# Altium PCB MUX DIGITAL PIN PCB.PcbDoc
Units mil, origin at the board's own origin, x right, y up, seen from the top; angles counter-clockwise.
Board outline 6000 x 4000 mil, 2 copper layers (Top Layer, Bottom Layer); 13 components, 62 nets, 146 pads, 39 vias.
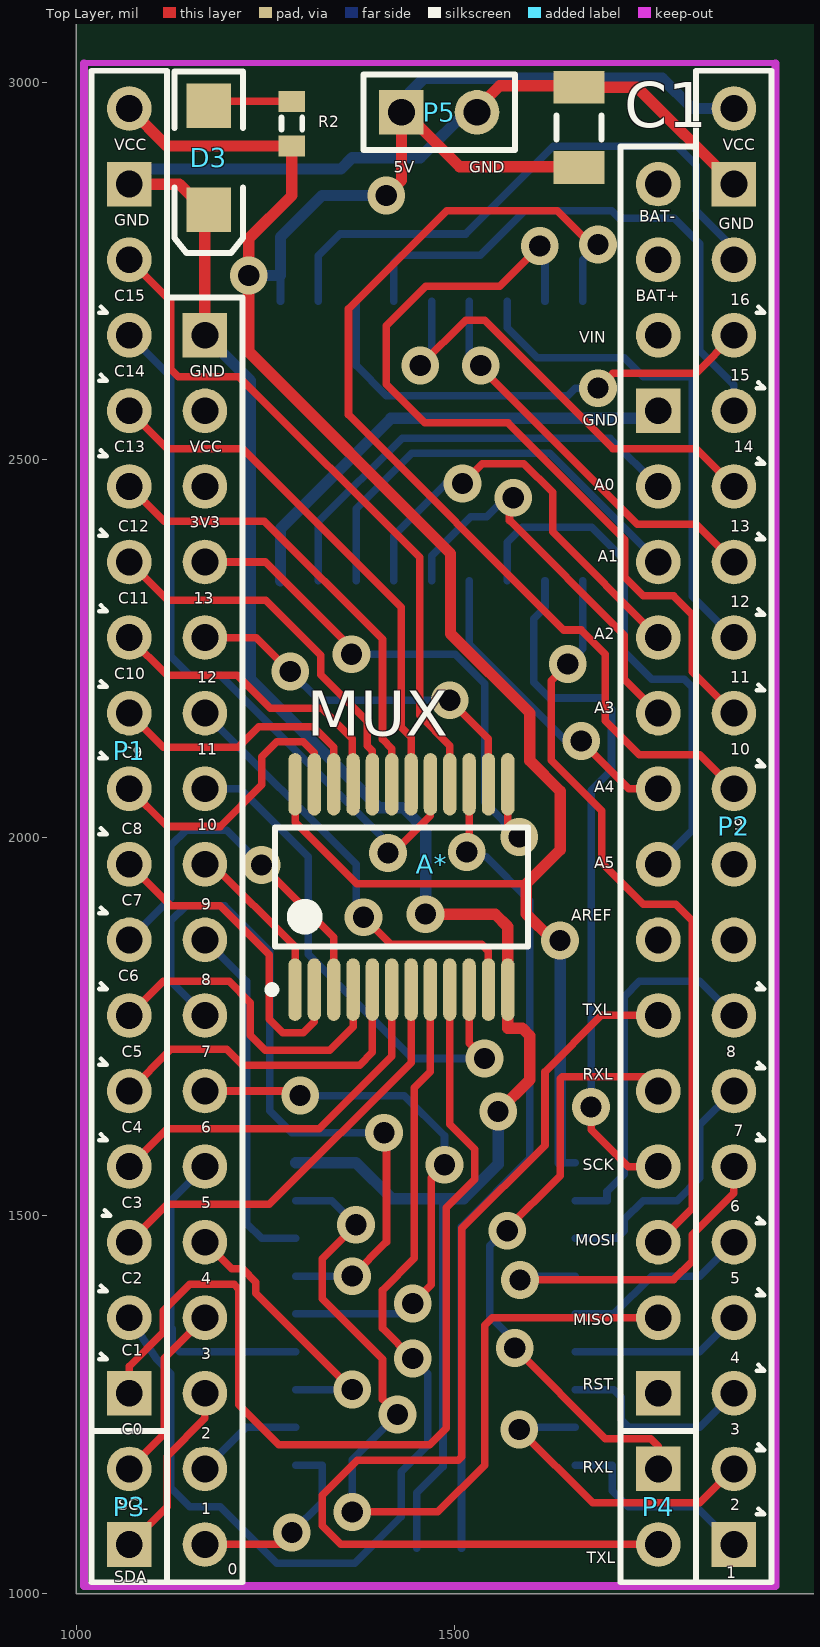
[diagram p0: Top Layer view]
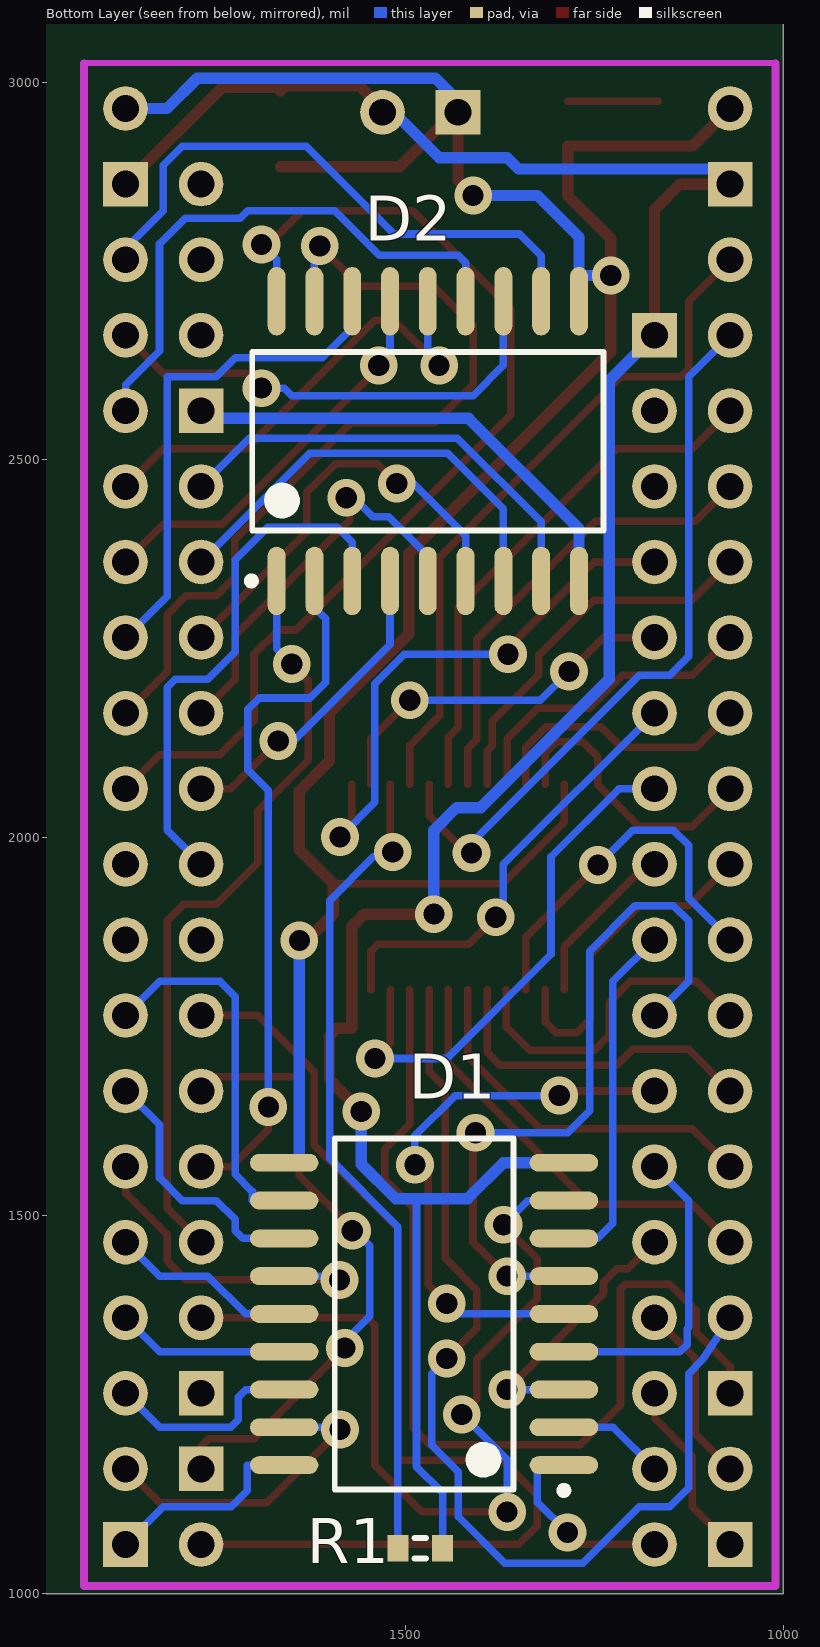
[diagram p1: Bottom Layer view, seen from below]

## Layer stack, top to bottom
Top Layer: signal copper 1.4
Dielectric: dielectric 12.6, FR-4, Dk 4.8
Bottom Layer: signal copper 1.4

## Board outline
1000,1000 7000,1000 7000,5000 1000,5000

## Design rules (kind name [scope] priority, off if disabled: settings)
Clearance Clearance_1 [All] p1: gap=6
Clearance [All] p2: gap=6
PolygonConnect [All] p1: connectstyle=Relief reliefconductorwidth=10 reliefentries=4 polygonreliefangle="90 Angle" airgapwidth=10
RoomDefinition "schematic MUX_DEMUX" [InComponentClass('schematic MUX_DEMUX')] p1: confinementstyle=ConfineIn formatcopy=TRUE lockcomponents=FALSE outline 1005,1005 1930,1005 1930,3030 1005,3030
RoutingVias [All] p1: holewidth=28 width=50 viastyle="Through Hole" minholewidth=28 minwidth=50 maxholewidth=28 maxwidth=50
SolderMaskExpansion [All] p1: expansion=4
Width [All] p1: maxlimit=15 minlimit=6 preferedwidth=10
28 further rules are at their usual default settings.

## Classes and differential pairs
component class "schematic MUX_DEMUX": 15 C1 D1 D2 D3 P1 P2 P3 P4 P5 R1 R2

## Components (designator, comment, footprint, x,y, rotation, side; value= is the part's Value field where it differs from the comment)
A* "A*" "PCBComponent_1 - duplicate" 1169.96,1065 r0 top
C1 "Cap Semi" C1206 1665,2940 r90 top
D1 "Component_1" SOIC127P1030X265-18N 1475,1370 r0 bottom
D2 "Component_1" SOIC127P1030X265-18N 1470,2525 r90 bottom
D3 "LED2" 3.2X1.6X1.1 1175,2900 r270 top
MUX "CD74HC4067*" SOP65P780X200-24N 1430,1935 r90 top (schematic designator M*)
P1 "Header 18" HDR1X18 1070,1265 r90 top
P2 "Header 18" HDR1X20 1869.96,1065 r90 top
P3 "Header 2" HDR1X2 1069.96,1065 r90 top
P4 "Header 2" HDR1X2 1770,1165 r270 top
P5 "Header 2" HDR1X2 1430,2960 r0 top
R1 "10K" J1-0603 1480,1060 r0 bottom
R2 "Res3" J1-0603 1285,2945 r270 top

## Footprints (in the part's own frame and the unit in brackets; to place one, negate y for a bottom-side part, rotate by r counter-clockwise, add the part's x,y. Pads: shape width x height; smd on the part's side, far side on the other; paste and mask are expansions set on the pad)
3.2X1.6X1.1 [mm] "SMT LED; 2 Flat Leads"
  rect 1.5x1.5 smd: 1(-1.75,0) 2(1.75,0)
  silkscreen extent -2.9,-1.15 3.2,1.15
C1206 [mm] "Chip Capacitor, Body 3.2x1.6mm, IPC High Density"
  rect 1.1x1.7 smd: 1(-1.35,0) 2(1.35,0)
  silkscreen extent -0.4,-0.75 0.4,0.75, body extent -1.7,-0.9 1.7,0.9, height 1.3
HDR1X2 [mm] "Connector; Header; 2 Position"
  rect 1.5x1.5 hole 0.9: 1(0,0)
  round 1.5 hole 0.9: 2(2.54,0)
  silkscreen extent -1.27,-1.27 3.81,1.27
HDR1X18 [mm] "Connector; Header; 18 Position"
  rect 1.5x1.5 hole 0.9: 1(0,0) 17(40.64,0)
  round 1.5 hole 0.9: 2(2.54,0) 3(5.08,0) 4(7.62,0) 5(10.16,0) 6(12.7,0) 7(15.24,0) 8(17.78,0) 9(20.32,0) 10(22.86,0) 11(25.4,0) 12(27.94,0) 13(30.48,0) 14(33.02,0) 15(35.56,0) 16(38.1,0) 18(43.18,0)
  silkscreen extent -1.27,-1.27 44.45,1.27
HDR1X20 [mm] "Connector; Header; 20 Position"
  rect 1.5x1.5 hole 0.9: 1(0,0) 19(45.72,0)
  round 1.5 hole 0.9: 2(2.54,0) 3(5.08,0) 4(7.62,0) 5(10.16,0) 6(12.7,0) 7(15.24,0) 8(17.78,0) 9(20.32,0) 10(22.86,0) 11(25.4,0) 12(27.94,0) 13(30.48,0) 14(33.02,0) 15(35.56,0) 16(38.1,0) 17(40.64,0) 18(43.18,0) 20(48.26,0)
  silkscreen extent -1.27,-1.27 49.53,1.27
J1-0603 [mm] "Chip Resistor, Body 1.6x0.8mm, IPC High Density"
  rect 0.7x0.9 smd: 1(-0.75,0) 2(0.75,0)
  silkscreen extent -0.2,-0.35 0.2,0.35, body extent -0.85,-0.48 0.85,0.48, height 0.9
"PCBComponent_1 - duplicate" [mm]
  round 1.5 hole 0.9: 0(0,0) 1(0,2.54) 2(0,5.08) 3(0,7.62) 3v3(0,35.56) 4(0,10.16) 5(0,12.7) 5V(0,38.1) 6(0,15.24) 7(0,17.78) 8(0,20.32) 9(0,22.86) 10(0,25.4) 11(0,27.94) 12(0,30.48) 13(0,33.02) A0(15.24,35.56) A1(15.24,33.02) A2(15.24,30.48) A3(15.24,27.94) A4(15.24,25.4) A5(15.24,22.86) AREF(15.24,20.32) BAT+(15.24,43.18) BAT-(15.24,45.72) MISO(15.24,7.62) MOSI(15.24,10.16) RXL(15.24,15.24) SCK(15.24,12.7) TXL(15.24,17.78) VIN(15.24,40.64)
  rect 1.5x1.5 hole 0.9: GND(0,40.64) GND2(15.24,38.1) RESET(15.24,5.08)
  silkscreen extent -1.27,-1.27 16.51,46.99
SOIC127P1030X265-18N [mm] "SOIC, 18-Leads, Body 11.55x7.50mm, Pitch 1.27mm, IPC Medium Density"
  oval 2.3x0.6 smd: 1(-4.7,5.08) 2(-4.7,3.81) 3(-4.7,2.54) 4(-4.7,1.27) 5(-4.7,0) 6(-4.7,-1.27) 7(-4.7,-2.54) 8(-4.7,-3.81) 9(-4.7,-5.08) 10(4.7,-5.08) 11(4.7,-3.81) 12(4.7,-2.54) 13(4.7,-1.27) 14(4.7,0) 15(4.7,1.27) 16(4.7,2.54) 17(4.7,3.81) 18(4.7,5.08)
  silkscreen extent -4.82,-5.9 3,6.05, body extent -3.8,-5.9 3.8,5.9, height 2.65
SOP65P780X200-24N [mm] "SOP, 24-Leads, Body 8.20x5.30mm, Pitch 0.65mm, IPC Medium Density"
  oval 2.1x0.45 smd: 1(-3.45,3.575) 2(-3.45,2.925) 3(-3.45,2.275) 4(-3.45,1.625) 5(-3.45,0.975) 6(-3.45,0.325) 7(-3.45,-0.325) 8(-3.45,-0.975) 9(-3.45,-1.625) 10(-3.45,-2.275) 11(-3.45,-2.925) 12(-3.45,-3.575) 13(3.45,-3.575) 14(3.45,-2.925) 15(3.45,-2.275) 16(3.45,-1.625) 17(3.45,-0.975) 18(3.45,-0.325) 19(3.45,0.325) 20(3.45,0.975) 21(3.45,1.625) 22(3.45,2.275) 23(3.45,2.925) 24(3.45,3.575)
  silkscreen extent -3.57,-4.25 2,4.47, body extent -2.8,-4.25 2.8,4.25, height 2

## Part data
A*: library part "ARDUINO POLOLU"
C1: "Capacitor (Semiconductor SIM Model)"
D3: "Typical RED, GREEN, YELLOW, AMBER GaAs LED"
MUX: library part Component_1, "analog mux/demux"
P1: "Header, 18-Pin"
P2: library part "Header 20", "Header, 20-Pin"
P3 P4 P5: "Header, 2-Pin"
R1: library part Res3, "Resistor"
R2: "Resistor"

## Via types
v1: diameter 50, hole 28, Top Layer to Bottom Layer, 39 vias

## Nets (pads, with @x,y where several pads share a name; then routed paths per layer and width w, separated by ;. In a path a pad name is that pad's centre, name@x,y a point inside that pad or via, vN(x,y) a via of type N, cw(c..) or ccw(c..) an arc to the next point about the centre after c; other vN are vias at no path point)
GND: A*.GND C1.2 D1.9 D3.2 MUX.12 P1.17 P2.19 P5.2 R1.1 | length 3346.1
  Top Layer w15: P1.17 1136.1,2865 1169.96,2831.14 A*.GND ; v1(1462,1899) 1554,1899 1570.75,1882.25 MUX.12 1570.75,1748 1590,1748 1600,1738 1600,1680 v1(1558,1638) ; P5.2@1518.9,2970 1535,2970 1560,2995 1658.15,2995 C1.2@1665,2988.15 ; C1.2 1741.81,2993.15 P2.19
  Bottom Layer w10: R1.1 1450.47,1133.47 1485,1168 1485,1520
  Bottom Layer w15: P1.17 1090,2885 1350,2885 1365,2900 1455,2900 P5.2@1520,2965 ; A*.GND 1230,2604.96 1230,2210 1400,2040 1432,2040 1462,2010 v1(1462,1899) ; D1.9 1370,1570 1417.36,1522.64 1512.64,1522.64 1558,1568 v1(1558,1638)
NetA*_0: A*.0 D1.1 | length 262.3
  Top Layer w10: A*.0 1269,1065 v1(1285,1081)
  Bottom Layer w10: v1(1285,1081) 1325,1121 1325,1170 D1.1
NetA*_1: A*.1 D1.2 | length 142.8
  Bottom Layer w10: A*.1 1224.96,1220 D1.2
NetA*_2: A*.2 P3.1 | length 241.4
  Top Layer w10: P3.1 1120,1115.04 1120,1182 1169.96,1231.96 A*.2
NetA*_3: A*.3 P3.2 | length 241.4
  Top Layer w10: P3.2 1116.32,1211.36 1116.32,1311.36 A*.3
NetA*_4: A*.4 D1.3 | length 359.4
  Top Layer w10: A*.4 1205.43,1429.53 1220,1429.53 1237.51,1412.01 1237.51,1397.49 v1(1365,1270)
  Bottom Layer w10: D1.3 v1(1365,1270)
NetA*_5: A*.5 D1.4 | length 421.8
  Bottom Layer w10: A*.5 1125,1520.04 1125,1352.26 1126.99,1350.27 1126.99,1329.53 1136.52,1320 D1.4
NetA*_6: A*.6 D1.5 | length 741.7
  Top Layer w10: A*.6 1290,1665 v1(1296,1659) ; v1(1445,1384) 1469.53,1408.53 1469.53,1550.06 v1(1487,1567.53)
  Bottom Layer w10: D1.5 1431,1370 v1(1445,1384) ; v1(1296,1659) 1434.01,1659 1487,1606.01 v1(1487,1567.53)
NetA*_7: A*.7 D1.6 | length 966.8
  Top Layer w10: v1(1365,1420) 1410.24,1465.24 1410.24,1606.52 v1(1407,1609.76)
  Bottom Layer w10: A*.7 1125,1809.96 1125,1890 1145,1910 1195.87,1910 1255.87,1850 1255.87,1639 1285.11,1609.76 v1(1407,1609.76) ; D1.6 v1(1365,1420)
NetA*_8: A*.8 D1.7 | length 471
  Bottom Layer w10: A*.8 1225,1809.96 1225,1490 1245,1470 D1.7
NetA*_9: A*.9 MUX.1 | length 221.1
  Top Layer w10: A*.9 1180,1965 1289.25,1855.75 MUX.1
NetA*_10: A*.10 MUX.10 | length 693.1
  Top Layer w10: MUX.10 1519.57,1728.43 v1(1540,1708)
  Bottom Layer w10: A*.10 1217,2065 1307,1975 1307,1846 1445,1708 v1(1540,1708)
NetA*_11: A*.11 MUX.11 | length 591.6
  Top Layer w10: v1(1380,1894.96) 1415.96,1859 1536.16,1859 1545.16,1850 MUX.11
  Bottom Layer w10: A*.11 1370,1964.96 1370,1904.96 v1(1380,1894.96)
NetA*_12: A*.12 MUX.14 | length 490.8
  Top Layer w10: A*.12 1238,2265 v1(1283,2220) ; v1(1494,2182) 1545.16,2130.84 MUX.14
  Bottom Layer w10: v1(1283,2220) 1321,2182 v1(1494,2182)
NetA*_13: A*.13 MUX.13 | length 739.6
  Top Layer w10: A*.13 1250,2365 1364,2251 v1(1364,2243) ; MUX.13 1570.75,2016.25 v1(1586,2001)
  Bottom Layer w10: v1(1364,2243) 1501,2243 1540.05,2203.95 1540.05,2046.95 v1(1586,2001)
NetA*_A0: A*.A0 D2.8 | length 600.5
  Bottom Layer w10: D2.8 1320,2418 1431,2529 1705.96,2529 A*.A0
NetA*_A1: A*.A1 D2.7 | length 585.4
  Bottom Layer w10: D2.7 1370,2435.24 1443.76,2509 1625.96,2509 A*.A1
NetA*_A2: A*.A2 D2.6 | length 575.1
  Top Layer w10: v1(1511,2469) 1537,2495 1592,2495 1630,2457 1630,2404.96 A*.A2
  Bottom Layer w10: D2.6 1420,2400 1489,2469 v1(1511,2469)
NetA*_A3: A*.A3 D2.5 | length 555.7
  Top Layer w10: v1(1578.02,2450) 1573.02,2455 1573.02,2419.91 1725,2267.93 1725,2209.96 A*.A3
  Bottom Layer w10: D2.5 1470,2373 1522,2425 1543.02,2425 1573.02,2455 v1(1578.02,2450)
NetA*_A4: A*.A4 D2.4 | length 413
  Top Layer w10: v1(1668,2128) 1731,2065 A*.A4
  Bottom Layer w10: D2.4 1520,2256 1648,2128 v1(1668,2128)
NetA*_A5: A*.A5 D2.3 | length 716.3
  Bottom Layer w10: D2.3 1570,2391 1590,2411 1682,2411 1725,2368 1725,2246 1761,2210 1804,2210 1815,2199 1815,2010.04 A*.A5
NetA*_GND2: A*.GND2 D2.9 | length 633.6
  Bottom Layer w10: A*.GND2@1759.96,2555 A*.GND2
  Bottom Layer w15: D2.9 1270,2409 1416,2555 A*.GND2@1759.96,2555
NetA*_MISO: A*.MISO D1.8 | length 1178
  Top Layer w10: v1(1365,1108) 1478,1108 1540,1170 1540,1355 1550,1365 A*.MISO ; v1(1370,1488) 1325,1443 1325,1390 1405,1310 1405,1257 v1(1425,1237)
  Bottom Layer w10: D1.8 1338,1520 v1(1370,1488) ; v1(1365,1108) 1365,1177 v1(1425,1237)
NetA*_MOSI: A*.MOSI D2.1 | length 1013.7
  Top Layer w10: v1(1650,2230) 1628,2208 1628,2102.63 1695,2035.63 1695,1967 1750,1912 1793,1912 1815,1890 1815,1510.04 A*.MOSI
  Bottom Layer w10: v1(1650,2230) 1670,2250 D2.1
NetA*_RXL: A*.RXL P4.1 | length 827.1
  Top Layer w10: v1(1570,1480) 1567,1480 1640,1553 1640,1681 1643,1684 1750.96,1684 A*.RXL ; v1(1580,1325) 1700,1205 1760,1205 1770,1195 P4.1
  Bottom Layer w10: v1(1570,1480) 1567,1480 1547,1460 1547,1367 1580,1334 v1(1580,1325)
NetA*_SCK: A*.SCK D2.2 | length 934.5
  Top Layer w10: v1(1681,1644) 1681,1614 1730,1565 A*.SCK
  Bottom Layer w10: D2.2 1620,2305 1605,2290 1605,2206 1626,2185 1693,2185 1708,2170 1708,2090 1681,2063 v1(1681,1644)
NetA*_TXL: A*.TXL P4.2 | length 1437
  Top Layer w10: A*.TXL 1694.71,1765 1620,1690.29 1620,1593.4 1509.76,1483.16 1509.76,1181.09 1505,1176.32 1371.32,1176.32 1325,1130 1325,1090 1350,1065 P4.2
NetD1_11: D1.11 P2.8 | length 493.4
  Bottom Layer w10: D1.11 1702,1520 1702,1532 1725,1555 1725,1790 1745,1810 1824.96,1810 P2.8
NetD1_12: D1.12 P2.7 | length 340.5
  Bottom Layer w10: D1.12 1715,1470 1725,1480 1725,1495 1750,1520 1795,1520 1825,1550 1825,1620.04 P2.7
NetD1_13: D1.13 P2.6 | length 461.2
  Top Layer w10: v1(1587,1415) 1790,1415 1815,1440 1815,1475 1869.96,1529.96 P2.6
  Bottom Layer w10: v1(1587,1415) 1592,1420 D1.13
NetD1_14: D1.14 P2.5 | length 249.3
  Bottom Layer w10: D1.14 1711,1370 1761,1420 1824.96,1420 P2.5
NetD1_15: D1.15 P2.4 | length 228.6
  Bottom Layer w10: D1.15 1824.96,1320 P2.4
NetD1_16: D1.16 P2.3 | length 266.8
  Bottom Layer w10: D1.16 1711,1270 1721,1260 1721,1230 1731,1220 1824.96,1220 P2.3
NetD1_17: D1.17 P2.2 | length 418.1
  Top Layer w10: v1(1586,1217) 1683,1120 1824.96,1120 P2.2
  Bottom Layer w10: v1(1586,1217) 1589,1220 D1.17
NetD1_18: D1.18 P2.1 | length 273.3
  Bottom Layer w10: D1.18 1709,1170 1709,1136 1730,1115 1819.96,1115 P2.1
NetD2_11: D2.11 P2.18 | length 776.1
  Bottom Layer w10: D2.11 1320,2770 1349,2799 1515.06,2799 1631.06,2915 1795,2915 1820,2890 1820,2830 1869.96,2780.04 P2.18
NetD2_12: D2.12 P2.17 | length 649.7
  Top Layer w10: v1(1690,2595) 1710,2615 1819.96,2615 P2.17
  Bottom Layer w10: D2.12 1370,2625 1410,2585 1650,2585 1660,2595 v1(1690,2595) v1@1705,2595
NetD2_13: D2.13 P2.16 | length 742.4
  Bottom Layer w10: D2.13 1420,2761 1430,2771 1534.41,2771 1593.41,2830 1708,2830 1718,2820 1791,2820 1825,2786 1825,2644.49 1869.96,2599.53 P2.16
NetD2_14: D2.14 P2.15 | length 635.2
  Top Layer w10: v1(1455,2625) 1515,2685 1540,2685 1710,2515 1819.96,2515 P2.15
  Bottom Layer w10: v1@1468,2625 v1(1455,2625) 1470,2640 D2.14
NetD2_15: D2.15 P2.14 | length 555.7
  Top Layer w10: v1(1535,2625) 1535,2630 1540,2635 1540,2616.98 1741.98,2415 1819.96,2415 P2.14
  Bottom Layer w10: D2.15 1520,2640 v1(1535,2625)
NetD2_16: D2.16 P2.13 | length 674.7
  Bottom Layer w10: D2.16 1570,2675 1610,2635 1725,2635 1750,2610 1815,2610 1815,2319.96 P2.13
NetD2_17: D2.17 P2.12 | length 1113.7
  Top Layer w10: v1(1613,2783) 1560,2730 1462.16,2730 1410,2677.84 1410,2600 1461,2549 1571,2549 1725.43,2394.57 1725.43,2345.04 1750,2320.47 1790,2320.47 1815,2295.47 1815,2219.96 P2.12
  Bottom Layer w10: v1(1613,2783) 1620,2776 D2.17
NetD2_18: D2.18 P2.11 | length 1392.3
  Top Layer w10: v1(1690,2785) 1681,2785 1636,2830 1490,2830 1360,2700 1360,2560 1645,2275 1668,2275 1700,2243 1700,2155 1745,2110 1824.96,2110 P2.11
  Bottom Layer w10: D2.18 1670,2765 v1(1690,2785)
NetD3_1: D3.1 R2.1 | length 120
  Top Layer w10: D3.1@1165,2974.53 R2.1
NetM*_2: MUX.2 P1.8 | length 435.5
  Top Layer w10: P1.8 1125,1910 1190,1910 1255,1845 1255,1760 1273,1742 1300,1742 1314.84,1756.84 MUX.2
NetM*_3: MUX.3 P1.7 | length 499.5
  Top Layer w10: v1(1245,1964.01) 1340.43,1868.58 MUX.3
  Bottom Layer w10: P1.7 1125,1920 1125,1990 1145,2010 1199.01,2010 v1(1245,1964.01)
NetM*_4: MUX.4 P1.6 | length 439.6
  Top Layer w10: P1.6 1115,1810 1202,1810 1230,1782 1230,1739 1250,1719 1335.02,1719 1366.02,1750 MUX.4
NetM*_5: MUX.5 P1.5 | length 443.3
  Top Layer w10: P1.5 1125,1720 1199,1720 1220,1699 1374.61,1699 1391.61,1716 MUX.5
NetM*_6: MUX.6 P1.4 | length 495.8
  Top Layer w10: P1.4 1120,1615 1321.15,1615 1417.2,1711.05 MUX.6
NetM*_7: MUX.7 P1.3 | length 567.9
  Top Layer w10: P1.3 1120,1515 1255.4,1515 1442.8,1702.4 MUX.7
NetM*_8: MUX.8 P1.2 | length 1378.3
  Top Layer w10: v1(1445,1311) 1405,1351 1405,1401.65 1447,1443.65 1447,1669 1468.39,1690.39 MUX.8
  Bottom Layer w10: P1.2 1106,1310 1125,1291 1125,1140 1150,1115 1190,1115 1264.76,1040.24 1368.24,1040.24 1430,1102 1430,1161.32 1465,1196.32 1465,1291 v1(1445,1311)
NetM*_9: MUX.9 P1.1 | length 1313.3
  Top Layer w10: P1.1 1070,1300.47 1115,1345.47 1115,1374.53 1150,1409.53 1208.47,1409.53 1215,1403 1215,1250 1268,1197 1467.53,1197 1489.53,1219 1489.53,1510.53 1527,1548 1527,1588 1493.98,1621.02 MUX.9
NetM*_15: MUX.15 R1.2 | length 1126.5
  Top Layer w10: v1@1510,1975 1510,1987.87 1519.57,1997.43 MUX.15
  Bottom Layer w10: R1.2 1509.53,1485.52 1600,1576 1600,1917 1542,1975 1522.87,1975 1510,1987.87 v1@1510,1975
  other v1: 1516.43,1981.43
NetM*_16: MUX.16 P1.16 | length 916.7
  Top Layer w10: P1.16 1125,2710 1125,2620 1135,2610 1215,2610 1453.97,2371.03 1453.97,2162 1493.98,2122 MUX.16
NetM*_17: MUX.17 P1.15 | length 968.2
  Top Layer w10: v1(1412.3,1980) 1419,1980 1468.39,2029.39 MUX.17
  Bottom Layer w10: P1.15 1125,2610 1125,2240 1150,2215 1190,2215 1412.3,1992.7 v1(1412.3,1980)
NetM*_18: MUX.18 P1.14 | length 707.2
  Top Layer w10: P1.14 1120,2515 1220,2515 1430,2305 1430,2146.14 1442.8,2133.34 MUX.18
NetM*_19: MUX.19 P1.13 | length 615.6
  Top Layer w10: P1.13 1116,2419 1248.48,2419 1405,2262.48 1405,2130.2 1417.2,2118 MUX.19
NetM*_20: MUX.20 P1.12 | length 503.5
  Top Layer w10: P1.12 1120.58,2314.42 1250.58,2314.42 1323.19,2241.81 1323.19,2216.04 1385,2154.23 1385,2121.92 1391.61,2115.31 MUX.20
NetM*_21: MUX.21 P1.11 | length 411.1
  Top Layer w10: P1.11 1120,2215 1213,2215 1256.34,2171.66 1324.37,2171.66 1365,2131.02 1365,2071.85 MUX.21
NetM*_22: MUX.22 P1.10 | length 360.7
  Top Layer w10: P1.10 1115,2120 1214,2120 1241.17,2147.17 1313.11,2147.17 1340.43,2119.85 MUX.22
NetM*_23: MUX.23 P1.9 | length 381.4
  Top Layer w10: P1.9 1120,2015 1190,2015 1245,2070 1245,2107.17 1265,2127.17 1300,2127.17 1314.84,2112.33 MUX.23
VCC: C1.1 D1.10 D2.10 MUX.24 P1.18 P2.20 P5.1 R2.2 | length 3390.8
  Top Layer w10: MUX.24 1289.25,2020.75 1371,1939 1595,1939 ; v1@1630.48,1864 v1(1640,1864)
  Top Layer w15: P1.18 1119.53,2915.47 R2.2 1285,2850 1228,2793 v1(1228,2744) 1228,2643.09 1495,2376.09 1495,2270 1600,2165 1600,2102 1640,2062 1640,1984 1595,1939 1595,1899.48 v1@1630.48,1864 ; v1(1410,2850) 1430,2870 1430,2965 1506.85,2888.15 C1.1@1665,2888.15
  Bottom Layer w10: D2.10 D2.10@1270,2744 ; D1.10@1640,1570 D1.10
  Bottom Layer w15: v1(1228,2744) 1270,2744 1270,2795 1325,2850 v1(1410,2850) ; P5.1@1420,2965 1460,3005 1775,3005 1815,2965 P2.20 ; D1.10@1640,1570 v1(1640,1864)
pads on no net: A*.3v3 A*.5V A*.AREF A*.BAT+ A*.BAT- A*.RESET A*.VIN P2.9 P2.10

## Keep-outs
Keep-Out Layer:
  lines w8: 1009.96,3025 1924.96,3025
  lines w10: 1009.96,3025 1009.96,1010 1924.96,1010 1924.96,3025

## Silkscreen, mask and mechanical layers (free items; w line width, h text height)
Top Overlay:
  lines w6: 1030,1310 1040,1310 1032.5,1317.5 ; 1030,1400 1040,1400 1032.5,1407.5 ; 1030,1600 1040,1600 1032.5,1607.5 ; 1030,1700 1040,1700 1032.5,1707.5 ; 1030,1800 1040,1800 1032.5,1807.5 ; 1030,1900 1040,1900 1032.5,1907.5 ; 1030,2005 1040,2005 1032.5,2012.5 ; 1030,2105 1040,2105 1032.5,2112.5 ; 1030,2200 1040,2200 1032.5,2207.5 ; 1030,2300 1040,2300 1032.5,2307.5 ; 1030,2400 1040,2400 1032.5,2407.5 ; 1030,2505 1040,2505 1032.5,2512.5 ; 1030,2605 1040,2605 1032.5,2612.5 ; 1030,2695 1040,2695 1032.5,2702.5 ; 1035,1500 1045,1500 1037.5,1507.5 ; 1900,1105 1910,1105 1902.5,1112.5 ; 1900,1190 1910,1190 1902.5,1197.5 ; 1900,1295 1910,1295 1902.5,1302.5 ; 1900,1395 1910,1395 1902.5,1402.5 ; 1900,1490 1910,1490 1902.5,1497.5 ; 1900,1600 1910,1600 1902.5,1607.5 ; 1900,1695 1910,1695 1902.5,1702.5 ; 1900,1800 1910,1800 1902.5,1807.5 ; 1900,2095 1910,2095 1902.5,2102.5 ; 1900,2195 1910,2195 1902.5,2202.5 ; 1900,2295 1910,2295 1902.5,2302.5 ; 1900,2395 1910,2395 1902.5,2402.5 ; 1900,2495 1910,2495 1902.5,2502.5 ; 1900,2595 1910,2595 1902.5,2602.5 ; 1900,2695 1910,2695 1902.5,2702.5
  text "VCC" at 1050,2910 h15
  text "VCC" at 1855,2910 h15
  text "5V" at 1420,2880 h15
  text "GND" at 1520,2880 h15
  text "BAT-" at 1745,2815 h15
  text "GND" at 1050,2810 h15
  text "GND" at 1850,2805 h15
  text "C15" at 1050,2710 h15
  text "BAT+" at 1740,2710 h15
  text "16" at 1865,2705 h15
  text "VIN" at 1665,2655 h15
  text "C14" at 1050,2610 h15
  text "GND" at 1150,2610 h15
  text "15" at 1865,2605 h15
  text "GND" at 1670,2545 h15
  text "C13" at 1050,2510 h15
  text "VCC" at 1150,2510 h15
  text "14" at 1870,2510 h15
  text "A0" at 1685,2460 h15
  text "3V3" at 1150,2410 h15
  text "C12" at 1055,2405 h15
  text "13" at 1865,2405 h15
  text "A1" at 1689.99,2365 h15
  text "C11" at 1055,2310 h15
  text "13" at 1155,2310 h15
  text "12" at 1865,2305 h15
  text "A2" at 1685,2263 h15
  text "C10" at 1050,2210 h15
  text "12" at 1160,2205 h15
  text "11" at 1865,2205 h15
  text "A3" at 1685,2165 h15
  text "11" at 1160,2110 h15
  text "10" at 1865,2110 h15
  text "C9" at 1060,2105 h15
  text "A4" at 1685,2060 h15
  text "10" at 1160,2010 h15
  text "9" at 1870,2010 h15
  text "C8" at 1060,2005 h15
  text "A5" at 1685,1960 h15
  text "C7" at 1060,1910 h15
  text "9" at 1165,1905 h15
  text "AREF" at 1655,1890 h15
  text "C6" at 1055,1810 h15
  text "8" at 1165,1805 h15
  text "TXL" at 1670,1765 h15
  text "C5" at 1060,1710 h15
  text "7" at 1165,1710 h15
  text "8" at 1860,1710 h15
  text "RXL" at 1670,1680 h15
  text "C4" at 1060,1610 h15
  text "6" at 1165,1610 h15
  text "7" at 1870,1605 h15
  text "SCK" at 1670,1560 h15
  text "C3" at 1060,1510 h15
  text "5" at 1165,1510 h15
  text "6" at 1865,1505 h15
  text "MOSI" at 1660,1460 h15
  text "C2" at 1060,1410 h15
  text "4" at 1165,1410 h15
  text "5" at 1865,1410 h15
  text "MISO" at 1657.5,1355 h15
  text "C1" at 1060,1315 h15
  text "3" at 1165,1310 h15
  text "4" at 1865,1305 h15
  text "RST" at 1670,1270 h15
  text "C0" at 1060,1210 h15
  text "3" at 1865,1210 h15
  text "2" at 1165,1205 h15
  text "RXL" at 1670,1160 h15
  text "SCL" at 1055,1110 h15
  text "2" at 1865,1110 h15
  text "1" at 1165,1105 h15
  text "TXL" at 1675,1040 h15
  text "0" at 1200,1025 h15
  text "1" at 1860,1020 h15
  text "SDA" at 1050,1015 h15